# EAGLE board PICqueno32_DIP.v1 (EAGLE 5.11)
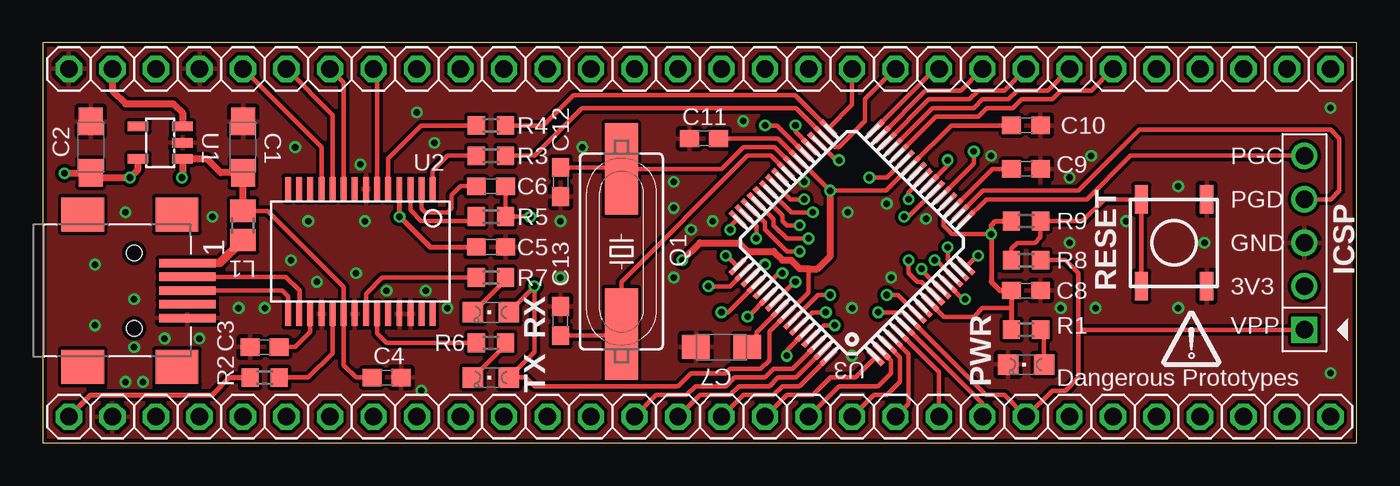
[diagram p0: board, top side]
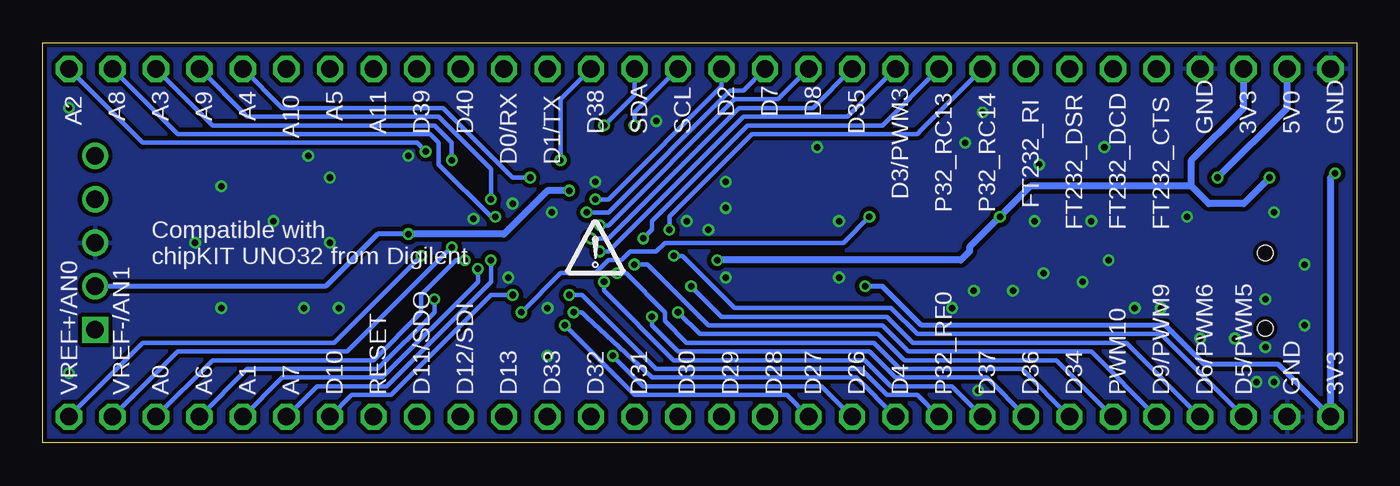
[diagram p1: board, bottom side, seen from below]

Size 76.71 x 23.37 mm. Coordinates in mm from the lower left corner, seen from the top.
Outline: 0,0 76.71,0 76.71,23.37 0,23.37 0,0
Copper layers (1*16): Top 0.035mm / dielectric 1.5mm / Bottom 0.035mm
Design rules "Fusion_eagle_rule_v1.1": minimum track width 6mil, minimum drill 12mil, track to track 6mil, track to pad 6mil, pad to pad 6mil, via to via 6mil, smd to smd 0mil, copper to edge 10mil, drill to drill 10mil, minimum pad ring 10mil, minimum via ring 6mil, stop-mask expansion 2mil, vias tented up to drill 100mil, thermal gap 10mil

## Footprints (pad centres in the part's own frame; a part is rotated, then mirrored left to right if it is on the bottom)
SMC_A = smd 1.6 x 1.4: + -1.5,0; - 1.5,0
C603 = smd 1.1 x 1: 1 -0.85,0; 2 0.85,0
HEADER_PRG_1X05 = drill 1.016 square: 1 -5.08,0 | drill 1.016 round: 2 -2.54,0; 3 0,0; 4 2.54,0; 5 5.08,0
1X30 = drill 1.016 octagon: 1 -36.83,0; 2 -34.29,0; 3 -31.75,0; 4 -29.21,0; 5 -26.67,0; 6 -24.13,0; 7 -21.59,0; 8 -19.05,0; 9 -16.51,0; 10 -13.97,0; 11 -11.43,0; 12 -8.89,0; 13 -6.35,0; 14 -3.81,0; 15 -1.27,0; 16 1.27,0; 17 3.81,0; 18 6.35,0; 19 8.89,0; 20 11.43,0; 21 13.97,0; 22 16.51,0; 23 19.05,0; 24 21.59,0; 25 24.13,0; 26 26.67,0; 27 29.21,0; 28 31.75,0; 29 34.29,0; 30 36.83,0
FB603 = smd 1.3 x 1.5: 1 -0.85,0; 2 0.85,0
LED-805 = smd 1.2 x 1.2: A 0,-1.05; C 0,1.05
HC-49U = smd 5.334 x 1.93: 1 -4.826,0; 2 4.826,0
R603 = smd 1 x 1.1: 1 -0.85,0; 2 0.85,0
TACT_SWITCH_SMALL = smd 1.651 x 0.762: 1 -2.54,1.905; 2 2.54,1.905; 3 -2.54,-1.905; 4 2.54,-1.905
SOT-23-5 = smd 0.55 x 1.2: 1 -0.95,-1.3; 2 0,-1.3; 3 0.95,-1.3; 4 0.95,1.3; 5 -0.95,1.3
SSOP28 = smd 0.348 x 1.397: 1 -4.225,-3.656; 2 -3.575,-3.656; 3 -2.925,-3.656; 4 -2.275,-3.656; 5 -1.625,-3.656; 6 -0.975,-3.656; 7 -0.325,-3.656; 8 0.325,-3.656; 9 0.975,-3.656; 10 1.625,-3.656; 11 2.275,-3.656; 12 2.925,-3.656; 13 3.575,-3.656; 14 4.225,-3.656; 15 4.225,3.656; 16 3.575,3.656; 17 2.925,3.656; 18 2.275,3.656; 19 1.625,3.656; 20 0.975,3.656; 21 0.325,3.656; 22 -0.325,3.656; 23 -0.975,3.656; 24 -1.625,3.656; 25 -2.275,3.656; 26 -2.925,3.656; 27 -3.575,3.656; 28 -4.225,3.656
TQFP64-10X10 = smd 1.2 x 0.3: 1 -5.7,3.75; 2 -5.7,3.25; 3 -5.7,2.75; 4 -5.7,2.25; 5 -5.7,1.75; 6 -5.7,1.25; 7 -5.7,0.75; 8 -5.7,0.25; 9 -5.7,-0.25; 10 -5.7,-0.75; 11 -5.7,-1.25; 12 -5.7,-1.75; 13 -5.7,-2.25; 14 -5.7,-2.75; 15 -5.7,-3.25; 16 -5.7,-3.75; 33 5.7,-3.75; 34 5.7,-3.25; 35 5.7,-2.75; 36 5.7,-2.25; 37 5.7,-1.75; 38 5.7,-1.25; 39 5.7,-0.75; 40 5.7,-0.25; 41 5.7,0.25; 42 5.7,0.75; 43 5.7,1.25; 44 5.7,1.75; 45 5.7,2.25; 46 5.7,2.75; 47 5.7,3.25; 48 5.7,3.75 | smd 0.3 x 1.2: 17 -3.75,-5.7; 18 -3.25,-5.7; 19 -2.75,-5.7; 20 -2.25,-5.7; 21 -1.75,-5.7; 22 -1.25,-5.7; 23 -0.75,-5.7; 24 -0.25,-5.7; 25 0.25,-5.7; 26 0.75,-5.7; 27 1.25,-5.7; 28 1.75,-5.7; 29 2.25,-5.7; 30 2.75,-5.7; 31 3.25,-5.7; 32 3.75,-5.7; 49 3.75,5.7; 50 3.25,5.7; 51 2.75,5.7; 52 2.25,5.7; 53 1.75,5.7; 54 1.25,5.7; 55 0.75,5.7; 56 0.25,5.7; 57 -0.25,5.7; 58 -0.75,5.7; 59 -1.25,5.7; 60 -1.75,5.7; 61 -2.25,5.7; 62 -2.75,5.7; 63 -3.25,5.7; 64 -3.75,5.7
CONN_USB_MINI-B = smd 2 x 2.5: BODY@1 -4.45,2.5; BODY@2 4.45,2.5; BODY@3 4.45,-3; BODY@4 -4.45,-3 | smd 0.5 x 3.3: D+ 0,3.1; D- -0.8,3.1; GND 1.6,3.1; ID 0.8,3.1; VUSB -1.6,3.1 | hole 0.9: -2.2,0; 2.2,0

## Placement (x,y rotation side)
C1  10uF  [SMC_A]  11.68,17.27 90 top
C2  1uF  [SMC_A]  2.79,17.27 90 top
C3  0.1uF  [C603]  12.95,5.59 180 top
C4  0.1uF  [C603]  20.07,3.81 0 top
C5  0.1uF  [C603]  26.16,11.43 0 top
C6  0.1uF  [C603]  26.16,14.99 0 top
C7  10uF  [SMC_A]  39.62,5.59 180 top
C8  0.1uF  [C603]  57.4,8.89 0 top
C9  0.1uF  [C603]  57.4,16 0 top
C10  0.1uF  [C603]  57.4,18.54 0 top
C11  0.1uF  [C603]  38.61,17.78 180 top
C12  30pF  [C603]  30.23,15.24 270 top
C13  30pF  [C603]  30.23,7.11 90 top
ICSP  HEADER_PRG_PIC_ICSPA  [HEADER_PRG_1X05]  73.66,11.68 90 top
JP1  [1X30]  38.35,1.52 0 top
JP2  [1X30]  38.35,21.84 0 top
L1  [FB603]  11.68,12.7 270 top
PWR  [LED-805]  57.4,4.57 90 top
Q1  8Mhz  [HC-49U]  33.78,11.18 270 top
R1  470R  [R603]  57.4,6.6 0 top
R2  10K  [R603]  12.95,3.81 0 top
R3  1K  [R603]  26.16,16.76 0 top
R4  1K  [R603]  26.16,18.54 0 top
R5  100R  [R603]  26.16,13.21 180 top
R6  470R  [R603]  26.16,5.84 0 top
R7  470R  [R603]  26.16,9.65 0 top
R8  220R  [R603]  57.4,10.67 0 top
R9  10K  [R603]  57.4,12.95 180 top
RESET  [TACT_SWITCH_SMALL]  66.04,11.68 270 top
RX  [LED-805]  26.16,7.62 90 top
TX  [LED-805]  26.16,3.81 90 top
U1  [SOT-23-5]  6.86,17.53 90 top
U2  FT232RL  [SSOP28]  18.54,11.18 180 top
U3  PIC32MX320F064H  [TQFP64-10X10]  47.24,11.68 135 top
U$1  DP_LOGO  [DP_LOGO]  44.45,10.41 0 bottom
U$2  [DP_LOGO]  67.06,5.08 0 top
USB1  CON-USB-MINI-BUSB1  [CONN_USB_MINI-B]  5.33,8.89 270 top

## Library data of the parts
C1-C13 ICSP L1 PWR Q1 R1-R9 RESET RX TX U1 U2 USB1 = dp_devices
JP1 JP2 = pinhead
U3 = microchip; MPN: PIC32MX320F064H-80I/PT; OC_FARNELL: 1778934; OC_NEWARK: 77M3147
U$1 = dp_devices; FF1: fullfillment by; FF2: Seeed studio; FF3: www.seeedstudio.com; LICENSE: CC-BY-SA; PROJECT: PICqueño32 DIP v1.0; URL1: http://; URL2: DangerousPrototypes.com
U$2 = dp_devices - Copy

## Nets
3V3: C2.+ C5.1 C8.1 C9.1 C10.1 C11.1 ICSP.2 JP1.1 JP2.3 R1.1 R2.1 R9.2 RX.A TX.A U1.5 U2.4 U3.10 U3.19 U3.26 U3.38 U3.57
5V0: C1.+ C4.1 JP2.2 L1.1 U1.1 U1.3 U2.20
A0: JP1.28 U3.14
A1: JP1.26 U3.12
A2: JP2.30 U3.21
A3: JP2.28 U3.23
A4: JP2.26 U3.27
A5: JP2.24 U3.29
A6: JP1.27 U3.13
A7: JP1.25 U3.11
A8: JP2.29 U3.22
A9: JP2.27 U3.24
A10: JP2.25 U3.28
A11: JP2.23 U3.30
D0/RX: JP2.20 R3.2 U3.34
D1/TX: JP2.19 R4.2 U3.33
D2: JP2.15 U3.42
D3/PWM3: JP2.11 U3.46
D4: JP1.11 U3.59
D5/PWM5: JP1.3 U3.49
D6/PWM6: JP1.4 U3.50
D7: JP2.14 U3.43
D8: JP2.13 U3.44
D9/PWM9: JP1.5 U3.51
D10: JP1.24 U3.8
D11/SDO: JP1.22 U3.6
D12/SDI: JP1.21 U3.5
D13: JP1.20 U3.4
D26: JP1.12 U3.60
D27: JP1.13 U3.61
D28: JP1.14 U3.62
D29: JP1.15 U3.63
D30: JP1.16 U3.64
D31: JP1.17 U3.1
D32: JP1.18 U3.2
D33: JP1.19 U3.3
D34: JP1.7 U3.53
D35: JP2.12 U3.45
D36: JP1.8 U3.54
D37: JP1.9 U3.55
D38: JP2.18 U3.35
D39: JP2.22 U3.31
D40: JP2.21 U3.32
D+: U2.15 USB1.D+
D-: U2.16 USB1.D-
FT232_CTS: JP2.5 U2.11
FT232_DCD: JP2.6 U2.10
FT232_DSR: JP2.7 U2.9
FT232_DTR: C6.1 U2.2
FT232_RI: JP2.8 U2.6
FT232_RTS: R5.2 U2.3
GND: C1.- C2.- C3.2 C4.2 C5.2 C7.- C8.2 C9.2 C10.2 C11.2 C12.2 C13.2 ICSP.3 JP1.2 JP2.1 JP2.4 PWR.C RESET.1 RESET.2 U1.2 U2.7 U2.18 U2.21 U2.25 U2.26 U3.9 U3.20 U3.25 U3.41 USB1.GND
N$1: C3.1 U2.17
N$2: R2.2 U2.19
N$3: R3.1 U2.1
N$4: R4.1 U2.5
N$5: C7.+ U3.56
N$6: R6.2 TX.C
N$11: R7.2 RX.C
N$12: R6.1 U2.23
N$15: PWR.A R1.2
N$16: R8.1 R9.1 RESET.3 RESET.4
N$19: C12.1 Q1.1 U3.39
N$20: C13.1 Q1.2 U3.40
N$32: R7.1 U2.22
P32_PGC: ICSP.5 U3.17
P32_PGD: ICSP.4 U3.18
P32_RC13: JP2.10 U3.47
P32_RC14: JP2.9 U3.48
P32_RF0: JP1.10 U3.58
P32_RST: C6.2 ICSP.1 JP1.23 R5.1 R8.2 U3.7
PWM10: JP1.6 U3.52
SCL: JP2.16 U3.37
SDA: JP2.17 U3.36
VREF+/AN0: JP1.30 U3.16
VREF-/AN1: JP1.29 U3.15
VUSB: L1.2 USB1.VUSB

## Tracks (layer width: path | path; a pad name or v marks a point on that pad's centre or on a via)
3V3  (via drill 0.38)
  Top 0.254: C11.1 42.92,17.78 U3.38 v45.96,14.73 v45.97,14.73 49.23,14.73 U3.26 53.04,18.54 C10.1 | U2.4 20.83,14.82 | U3.10 52.62,7.37 54.36,7.37 54.86,7.87 56.55,7.87 | C9.1 55.45,16 U3.19 52.58,13.13 52.58,12.7 53.09,12.19 v55.37,12.19 | 27.21,7.65 v28.7,9.14 28.7,5.3 TX.A 28.19,3.81 28.7,3.3 37.08,3.3 37.85,4.06 39.88,4.06 40.13,4.32 41.91,4.32 42.42,4.83 42.42,6.5 U3.57 44.7,8.79 44.7,10.16
  Top 0.305: R2.1 10.92,3.81 9.91,2.79 2.79,2.79 JP1.1 | R1.1 56.55,7.87 C8.1 55.88,8.89 55.37,9.4 v55.37,12.19 55.37,12.7 55.63,12.95 R9.2 | U2.4 20.82,13.22 v20.83,13.21 22.61,11.43 C5.1 | 27.21,7.65 RX.A
  Top 0.406: v1.27,15.75 2.29,15.75 | 2.29,15.75 2.77,15.75 C2.+ | U1.5 5.56,15.97 v5.08,15.49 2.54,15.49 2.29,15.75 | v37.34,10.67 38.35,11.68 40.64,11.68 41.15,11.18 42.67,11.18 43.18,10.67 43.69,10.67 44.2,10.16 44.7,10.16 45.21,10.16 45.97,10.92 v45.97,14.73
  Bottom 0.305: ICSP.2 60.2,9.14 57.15,12.19 v55.37,12.19 | v28.7,9.14 27.69,9.14 25.4,6.86 11.18,6.86 8.89,4.57 4.57,4.57 JP1.1
  Bottom 0.406: JP1.1 1.52,15.49 v1.27,15.75 1.29,15.77 | JP2.3 6.6,19.56 9.65,16.51 9.65,14.99 | v45.97,14.73 47.24,14.73 49.78,12.19 v55.37,12.19 | 9.65,14.99 8.64,13.97 6.6,13.97 v5.08,15.49 | 9.65,14.99 19.05,14.99 v20.83,13.21 22.61,11.43 22.61,11.18 23.11,10.67 v37.34,10.67
5V0  (via drill 0.38)
  Top 0.254: C4.1 18.29,3.81 17.57,4.53 U2.20 17.57,9.1 13.12,13.55 L1.1
  Top 0.406: L1.1 C1.+ 10.39,15.77 9.59,16.58 U1.1 8.16,15.52 v8.13,15.49 | JP2.2 4.06,20.57 4.83,19.81 7.62,19.81 8.16,19.27 U1.3
  Bottom 0.406: v8.13,15.49 4.06,19.56 JP2.2
A0  (via drill 0.38)
  Top 0.254: U3.14 52.15,10.67 v52.07,10.67
  Bottom 0.254: v52.07,10.67 52.58,10.67 54.61,8.64 54.61,7.62 57.4,4.83 66.8,4.83 JP1.28
A1  (via drill 0.38)
  Top 0.254: U3.12 51.31,10.1 v51.31,10.16
  Bottom 0.254: v51.31,10.16 51.31,9.4 56.9,3.81 62.74,3.81 JP1.26
A2  (via drill 0.38)
  Top 0.254: U3.21 54.36,16.32 v54.36,17.02
  Bottom 0.254: v54.36,17.02 54.86,17.53 70.87,17.53 JP2.30
A3  (via drill 0.38)
  Top 0.254: U3.23 52.88,16.26 v52.83,16.51
  Bottom 0.254: JP2.28 66.8,18.54 53.85,18.54 52.83,17.53 v52.83,16.51
A4  (via drill 0.38)
  Top 0.254: U3.27 49.29,15.49 v48.26,15.49
  Bottom 0.254: v48.26,15.49 49.28,15.49 53.34,19.56 62.74,19.56 JP2.26
A5
  Top 0.254: U3.29 51.94,19.56 54.36,19.56 54.86,20.07 56.39,20.07 56.9,20.57 58.67,20.57 JP2.24
A6  (via drill 0.38)
  Top 0.254: U3.13 53.73,8.38 v53.85,8.38
  Bottom 0.254: v53.85,8.38 53.85,7.62 57.15,4.32 64.77,4.32 JP1.27
A7  (via drill 0.38)
  Top 0.254: v50.55,10.67 50.55,9.91 51.05,9.4 51.3,9.4 U3.11
  Bottom 0.254: v50.55,10.67 50.55,9.4 56.64,3.3 60.71,3.3 JP1.25
A8  (via drill 0.38)
  Top 0.254: U3.22 50.55,13.22 v50.29,13.21
  Bottom 0.254: JP2.29 68.83,18.03 54.1,18.03 53.59,17.53 53.59,16.26 50.55,13.21 v50.29,13.21
A9  (via drill 0.38)
  Top 0.254: 50.9,14.99 U3.24 50.55,14.63 v50.55,14.22
  Bottom 0.254: JP2.27 64.77,19.05 53.59,19.05 50.55,16 v50.55,14.22
A10
  Top 0.254: U3.28 52.14,19.05 54.61,19.05 55.12,19.56 56.64,19.56 57.15,20.07 58.93,20.07 59.44,20.57 61.21,20.57 JP2.25
A11
  Top 0.254: U3.30 51.74,20.07 54.1,20.07 54.61,20.57 56.13,20.57 JP2.23
D0/RX
  Top 0.254: R3.2 28.7,16.76 31.5,19.56 43.97,19.56 U3.34 46.25,17.27 46.48,17.27 48.01,18.8 48.01,20.07 JP2.20
D1/TX
  Top 0.254: R4.2 29.21,18.54 30.99,20.32 43.91,20.32 U3.33 47.24,19.74 JP2.19
D2  (via drill 0.38)
  Top 0.254: U3.42 43.64,14.22 v44.45,14.22
  Bottom 0.254: v44.45,14.22 43.69,14.22 37.08,20.83 JP2.15
D3/PWM3  (via drill 0.38)
  Top 0.254: U3.46 42.16,12.88 42.16,12.45 43.43,11.18 v44.2,11.18
  Bottom 0.254: JP2.11 29.72,19.05 35.81,19.05 43.69,11.18 v44.2,11.18
D4  (via drill 0.38)
  Top 0.254: U3.59 44.95,7.62 v45.72,7.62
  Bottom 0.254: v45.72,7.62 45.21,7.62 44.96,7.37 41.15,3.81 29.21,3.81 JP1.11
D5/PWM5  (via drill 0.38)
  Top 0.254: U3.49 39.95,10.92 v39.88,10.92
  Bottom 0.254: v39.88,10.92 39.37,10.92 36.32,7.87 27.18,7.87 25.65,6.35 11.43,6.35 JP1.3
D6/PWM6  (via drill 0.38)
  Top 0.254: U3.50 40.11,9.14 v38.86,9.14
  Bottom 0.254: v38.86,9.14 37.08,7.37 27.43,7.37 25.91,5.84 13.46,5.84 JP1.4
D7  (via drill 0.38)
  Top 0.254: U3.43 43.7,13.46 v44.96,13.46
  Bottom 0.254: JP2.14 35.81,20.57 36.58,20.57 43.69,13.46 v44.96,13.46
D8  (via drill 0.38)
  Top 0.254: U3.44 43.18,13.27 43.18,12.95 43.43,12.7 v44.2,12.7
  Bottom 0.254: JP2.13 33.78,20.07 36.32,20.07 43.69,12.7 v44.2,12.7
D9/PWM9  (via drill 0.38)
  Top 0.254: U3.51 42.09,10.41 v42.16,10.41
  Bottom 0.254: v42.16,10.41 41.4,10.41 37.85,6.86 27.69,6.86 26.16,5.33 15.49,5.33 JP1.5
D10  (via drill 0.38)
  Top 0.254: U3.8 49.94,8.64 v49.28,8.64
  Bottom 0.254: v49.28,8.64 50.55,8.64 56.39,2.79 58.67,2.79 JP1.24
D11/SDO
  Top 0.254: JP1.22 54.86,2.3 U3.6
D12/SDI
  Top 0.254: JP1.21 52.32,4.13 U3.5
D13
  Top 0.254: U3.4 50.55,5.2 50.55,2.29 JP1.20
D26  (via drill 0.38)
  Top 0.254: U3.60 43.43,5.4 v43.43,5.08
  Bottom 0.254: v43.43,5.08 41.66,3.3 31.24,3.3 JP1.12
D27  (via drill 0.38)
  Top 0.254: U3.61 45.6,6.86 v46.23,6.86
  Bottom 0.254: v46.23,6.86 42.16,2.79 33.27,2.79 JP1.13
D28
  Top 0.254: U3.62 43.77,4.32 42.67,4.32 42.16,3.81 40.39,3.81 39.88,3.3 38.1,3.3 37.59,2.79 35.81,2.79 JP1.14
D29
  Top 0.254: U3.63 43.97,3.81 42.93,3.81 42.42,3.3 40.64,3.3 40.13,2.79 38.35,2.79 JP1.15
D30
  Top 0.254: U3.64 44.16,3.3 43.18,3.3 42.67,2.79 40.89,2.79 JP1.16
D31
  Top 0.254: U3.1 47.43,3.81 45.97,3.81 44.96,2.79 43.43,2.79 JP1.17
D32
  Top 0.254: U3.2 49.53,4.8 49.53,4.06 48.77,3.3 46.48,3.3 JP1.18
D33
  Top 0.254: U3.3 50.04,5 50.04,3.56 49.28,2.79 48.51,2.79 JP1.19
D34  (via drill 0.38)
  Top 0.254: U3.53 42.99,9.91 v43.18,9.91
  Bottom 0.254: v43.18,9.91 42.67,9.91 40.39,7.62 40.39,7.11 39.12,5.84 28.19,5.84 26.67,4.32 19.56,4.32 JP1.7
D35  (via drill 0.38)
  Top 0.254: U3.45 42.67,13.07 42.67,12.7 43.43,11.94 v44.7,11.94
  Bottom 0.254: v44.7,11.94 43.69,11.94 36.07,19.56 31.75,19.56 JP2.12
D36  (via drill 0.38)
  Top 0.254: U3.54 41.16,7.37 v41.15,7.37
  Bottom 0.254: v41.15,7.37 41.15,6.86 39.62,5.33 28.45,5.33 26.92,3.81 21.59,3.81 JP1.8
D37  (via drill 0.38)
  Top 0.254: U3.55 43.9,9.4 v43.94,9.4
  Bottom 0.254: v43.94,9.4 43.94,8.89 39.88,4.83 28.7,4.83 27.18,3.3 23.62,3.3 JP1.9
D38  (via drill 0.38)
  Top 0.254: U3.35 46.31,16.51 v46.48,16.51
  Bottom 0.254: v46.48,16.51 46.48,20.07 JP2.18
D39
  Top 0.254: U3.31 51.54,20.57 53.59,20.57 JP2.22
D40
  Top 0.254: U3.32 52.1,21.84 JP2.21
D+
  Top 0.254: USB1.D+ 13.97,8.89 14.32,8.54 U2.15
D-
  Top 0.254: USB1.D- 14.19,9.69 14.99,8.89 14.99,7.54 U2.16
FT232_CTS
  Top 0.254: U2.11 16.27,17.26 JP2.5
FT232_DCD
  Top 0.254: U2.10 16.92,19.15 JP2.6
FT232_DSR
  Top 0.254: U2.9 17.57,21.04 JP2.7
FT232_DTR
  Top 0.254: U2.2 22.12,13.7 22.35,13.46 23.62,13.46 23.88,13.72 23.88,14.48 24.38,14.99 C6.1
FT232_RI
  Top 0.254: U2.6 19.52,21.63 JP2.8
FT232_RTS
  Top 0.254: U2.3 21.47,13.59 22.1,12.95 25.06,12.95 R5.2
GND  (via drill 0.38)
  other vias: 23.62,7.87 22.35,8.89 4.83,3.56 5.84,3.56 20.07,8.89 55.37,16.76 61.21,16.76 59.94,15.49 39.12,12.95 37.85,12.45 30.23,12.95 30.23,9.65 36.83,15.24 36.83,13.72 36.83,9.65 31.5,17.27 40.89,18.8 44.45,15.24 47.24,5.08 47.24,7.87 46.99,13.46 51.56,13.08 49.28,13.97 59.44,7.87 66.29,14.99 67.82,11.68 63.25,12.95 59.94,11.68 61.47,7.87 75.18,19.56 75.18,4.06 22.1,3.05 66.29,7.87 18.8,12.95 15.49,12.95 18.29,9.91 16,9.4 14.48,10.67 12.95,7.87 11.43,7.87 5.33,5.59 5.33,8.38 7.11,6.1 9.14,6.1 18.54,16.26 22.86,17.53 21.84,19.3 14.73,17.27 3.05,10.41 4.83,13.46 9.91,13.21 3.05,6.86 49.53,9.65
  pour Top (isolate 0.203): 0,0 76.71,0 76.71,23.37 0,23.37
  pour Bottom (isolate 0.254): 0,0 76.71,0 76.71,23.37 0,23.37
N$1
  Top 0.254: C3.1 14.73,5.59 15.62,6.47 U2.17
N$2
  Top 0.254: U2.19 16.92,5.23 15.49,3.81 R2.2
N$3
  Top 0.254: R3.1 23.62,16.76 22.77,15.91 U2.1
N$4
  Top 0.254: U2.5 20.17,16.61 22.1,18.54 R4.1
N$5
  Top 0.254: U3.56 41.66,6.45 41.66,6.1 41.15,5.59 C7.+
N$6
  Top 0.254: R6.2 27.01,5.71 TX.C
N$11
  Top 0.254: R7.2 27.01,9.52 RX.C
N$12
  Top 0.254: R6.1 20.07,5.84 19.52,6.39 U2.23
N$15
  Top 0.254: PWR.A 58.45,6.4 R1.2
N$16
  Top 0.254: R8.1 56.55,11.34 56.9,11.68 57.91,11.68 58.25,12.03 R9.1 60.71,12.95 61.98,14.22 RESET.3 RESET.4
N$19
  Top 0.254: U3.39 42.72,17.27 40.89,17.27 39.62,16 Q1.1 33.69,16.09 C12.1
N$20
  Top 0.254: U3.40 42.52,16.76 41.15,16.76 33.78,9.4 Q1.2 33.69,6.26 C13.1
N$32
  Top 0.254: R7.1 19.81,9.65 18.87,8.71 U2.22
P32_PGC
  Top 0.254: ICSP.5 63.5,16.76 60.96,14.22 55.09,14.22 U3.17
P32_PGD
  Top 0.254: ICSP.4 75.18,14.22 75.69,14.73 75.69,17.78 75.18,18.29 64.01,18.29 60.45,14.73 54.89,14.73 U3.18
P32_RC13  (via drill 0.38)
  Top 0.254: U3.47 41.66,12.68 v41.66,11.94
  Bottom 0.254: v41.66,11.94 41.15,12.45 41.15,12.95 35.56,18.54 27.69,18.54 JP2.10
P32_RC14  (via drill 0.38)
  Top 0.254: U3.48 40.13,12.63 v40.13,12.45
  Bottom 0.254: JP2.9 25.4,18.29 25.65,18.03 35.31,18.03 40.13,13.21 v40.13,12.45
P32_RF0  (via drill 0.38)
  Top 0.254: U3.58 45.26,8.64 v45.97,8.64
  Bottom 0.254: JP1.10 25.65,2.79 27.43,2.79 28.96,4.32 40.89,4.32 45.21,8.64 v45.97,8.64
P32_RST  (via drill 0.38)
  Top 0.254: R8.2 59.69,10.67 60.45,9.91 60.45,6.6 | 60.45,6.6 60.45,3.81 59.69,3.05 58.93,3.05 JP1.23 56.13,2.79 55.07,2.79 U3.7 50.25,7.62 v48.77,7.62 | 60.45,6.6 ICSP.1 | C6.2 R5.1 v28.45,13.21
  Bottom 0.254: v28.45,13.21 29.97,11.68 40.39,11.68 40.89,11.18 42.42,11.18 42.93,10.67 43.69,10.67 44.45,9.91 46.48,9.91 v48.77,7.62
PWM10  (via drill 0.38)
  Top 0.254: U3.52 40,7.62 v39.62,7.62
  Bottom 0.254: v39.62,7.62 38.35,6.35 27.94,6.35 26.42,4.83 17.53,4.83 JP1.6
SCL  (via drill 0.38)
  Top 0.254: U3.37 42.86,18.54 v42.16,18.54
  Bottom 0.254: JP2.16 42.16,19.3 v42.16,18.54
SDA  (via drill 0.38)
  Top 0.254: U3.36 43.94,18.17 v43.94,18.54
  Bottom 0.254: v43.94,18.54 42.16,20.32 JP2.17
VREF+/AN0  (via drill 0.38)
  Top 0.254: U3.16 54.54,10.92 v54.61,10.92
  Bottom 0.254: v54.61,10.92 59.69,5.84 70.87,5.84 JP1.30
VREF-/AN1  (via drill 0.38)
  Top 0.254: U3.15 52.83,10.69 v52.83,11.43
  Bottom 0.254: v52.83,11.43 58.93,5.33 68.83,5.33 JP1.29
VUSB
  Top 0.508: USB1.VUSB 10.32,10.49 L1.2

## Text on the board
tNames: PGC | PGD | GND | 3V3 | VPP | Dangerous Prototypes
bNames: D8 | D7 | D2 | A5 | A4 | A9 | A3 | A8 | A2 | GND | 5V0 | 3V3 | GND | D35 | SCL | SDA | D38 | D40 | D39 | A11 | A10 | D1/TX | D0/RX | FT232_RI | D3/PWM3 | P32_RC14 | P32_RC13 | FT232_CTS | FT232_DCD | FT232_DSR | Compatible with | chipKIT UNO32 from Digilent | 3V3 | GND | D5/PWM5 | D6/PWM6 | D9/PWM9 | PWM10 | D34 | D36 | D37 | P32_RF0 | D4 | D26 | D27 | D28 | D29 | D30 | D31 | D32 | D33 | D13 | D12/SDI | D11/SDO | RESET | D10 | A7 | A1 | A6 | A0 | VREF-/AN1 | VREF+/AN0